# EAGLE board techlab (EAGLE 7.7.0)
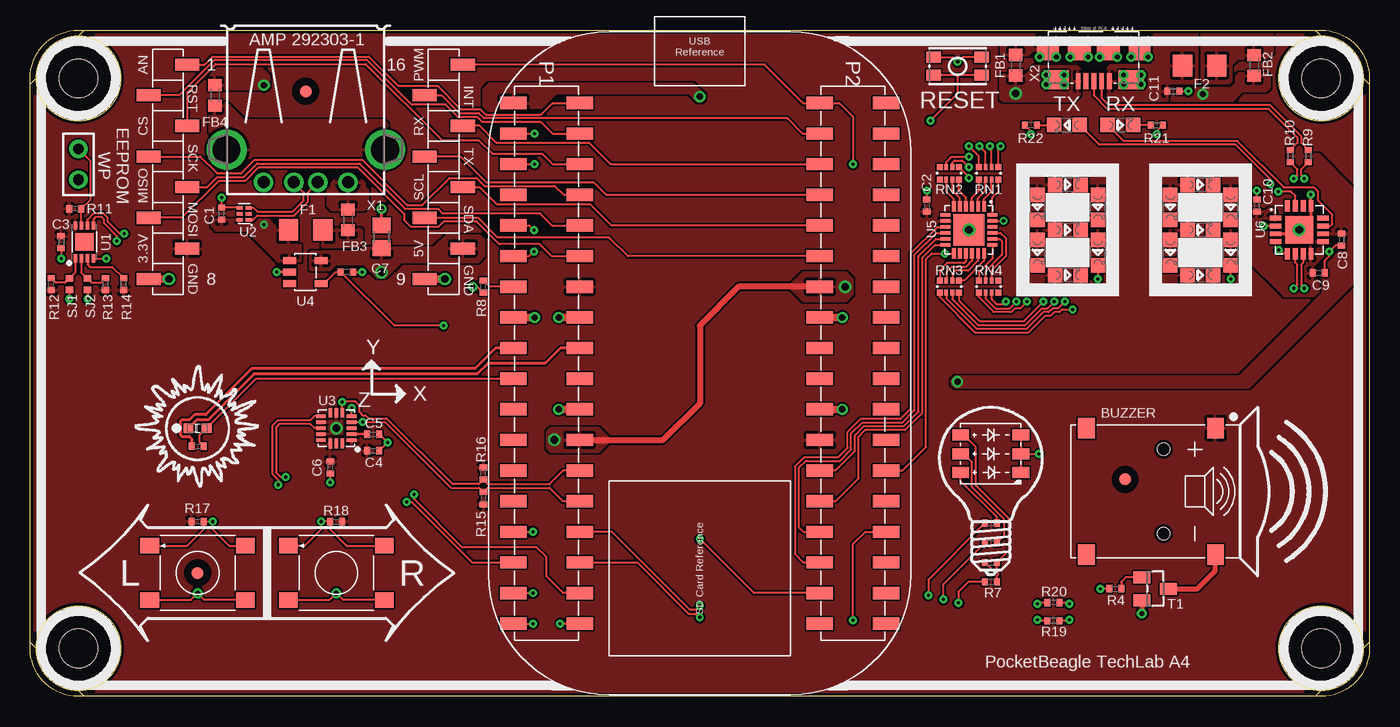
[diagram p0: board, top side]
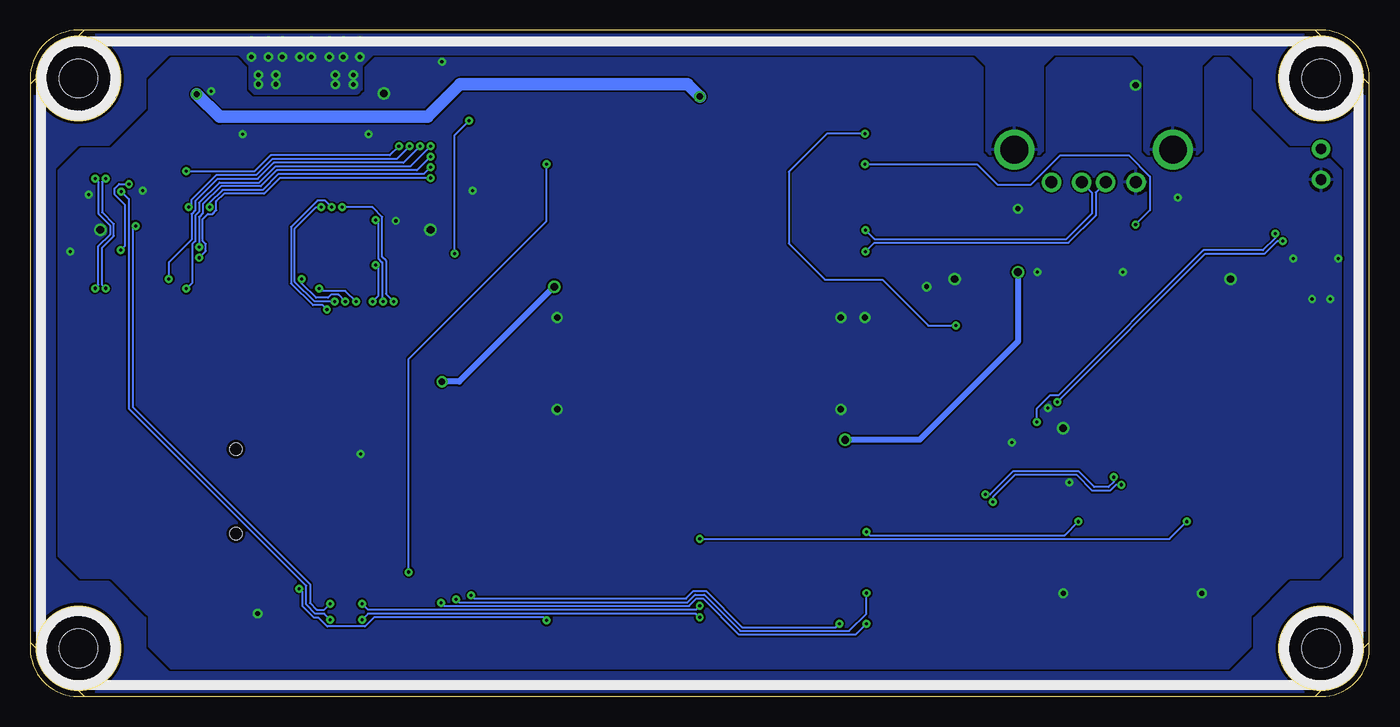
[diagram p1: board, bottom side, seen from below]

Size 111 x 55.25 mm. Coordinates in mm from the lower left corner, seen from the top.
Outline: 4,54.75 4.5,55.25 106.5,55.25 107,54.75
Outline: 110.5,51.25 111,50.75 111,4.5 110.5,4
Outline: 107,0.5 106.5,0 4.5,0 4,0.5
Outline: 0.5,4 0,4.5 0,50.75 0.5,51.25
Outline: circle at 4,51.25 radius 3.5
Outline: circle at 107,51.25 radius 3.5
Outline: circle at 4,4 radius 3.5
Outline: circle at 107,4 radius 3.5
Copper layers (1+16): Top 0.035mm / dielectric 1.5mm / Bottom 0.035mm
Design rules "default *": minimum track width 6mil, minimum drill 10mil, track to track 6mil, track to pad 6mil, pad to pad 6mil, via to via 6mil, smd to smd 0mil, copper to edge 10mil, drill to drill 10mil, minimum pad ring 12mil, minimum via ring 8mil, stop-mask expansion 2mil, vias tented up to drill 50mil, thermal gap 10mil
Holes 3.2 mm at 4,51.25 107,51.25 4,4 107,4
Milling: 8 lines

## Footprints (pad centres in the part's own frame; a part is rotated, then mirrored left to right if it is on the bottom)
SMD-140035H = smd 1.7 x 1.4: + -5.25,5; - 5.25,5; NC1 -5.25,-5.7; NC2 5.25,-5.7 | hole 1: -3.5,0.7; 3.5,0.7
0402 = smd 0.5 x 0.6: 1 -0.5,0; 2 0.5,0
0805 = smd 1.3 x 1.5: 1 -0.95,0; 2 0.95,0
PARALLEL-8PIN-0.9INCH_PITCH-SMT_GP = smd 2 x 1: 1 -9.84,8.89; 2 -13.02,6.35; 3 -9.84,3.81; 4 -13.02,1.27; 5 -9.84,-1.27; 6 -13.02,-3.81; 7 -9.84,-6.35; 8 -13.02,-8.89; 9 9.84,-8.89; 10 13.02,-6.35; 11 9.84,-3.81; 12 13.02,-1.27; 13 9.84,1.27; 14 13.02,3.81; 15 9.84,6.35; 16 13.02,8.89
1206 = smd 1.6 x 1.803: 1 -1.422,0; 2 1.422,0
0603 = smd 1 x 1.1: 1 -0.85,0; 2 0.85,0
FIDUCIAL_40MIL = smd 1.016 x 1.016: P$1 0,0
JUMPER-(X2) = drill 0.889 pad 1.524: 1 -1.27,0; 2 1.27,0
6MM_TACTILE-SWITCH = smd 1.55 x 1.3: 1 -3.975,2.25; 2 3.975,2.25; 3 -3.975,-2.25; 4 3.975,-2.25
LED_RGB_5050 = smd 1.4 x 0.9: 1(+) -2.5,-1.55; 2(+) -2.5,0; 3(+) -2.5,1.55; 4(-) 2.5,1.55; 5(-) 2.5,0; 6(-) 2.5,-1.55
0805-LED = smd 1.2 x 1.2: A 0,1.05; K 0,-1.05
POCKETBEAGLE-(ORIGIN-CENTER)-SMT.PADS(ONLY)-NO.RESTRICT = smd 1.02 x 2.2: P1.1 -21.59,-15.45; P1.2 -21.59,-9.95; P1.3 -19.05,-15.45; P1.4 -19.05,-9.95; P1.5 -16.51,-15.45; P1.6 -16.51,-9.95; P1.7 -13.97,-15.45; P1.8 -13.97,-9.95; P1.9 -11.43,-15.45; P1.10 -11.43,-9.95; P1.11 -8.89,-15.45; P1.12 -8.89,-9.95; P1.13 -6.35,-15.45; P1.14 -6.35,-9.95; P1.15 -3.81,-15.45; P1.16 -3.81,-9.95; P1.17 -1.27,-15.45; P1.18 -1.27,-9.95; P1.19 1.27,-15.45; P1.20 1.27,-9.95; P1.21 3.81,-15.45; P1.22 3.81,-9.95; P1.23 6.35,-15.45; P1.24 6.35,-9.95; P1.25 8.89,-15.45; P1.26 8.89,-9.95; P1.27 11.43,-15.45; P1.28 11.43,-9.95; P1.29 13.97,-15.45; P1.30 13.97,-9.95; P1.31 16.51,-15.45; P1.32 16.51,-9.95; P1.33 19.05,-15.45; P1.34 19.05,-9.95; P1.35 21.59,-15.45; P1.36 21.59,-9.95; P2.1 -21.59,9.95; P2.2 -21.59,15.45; P2.3 -19.05,9.95; P2.4 -19.05,15.45; P2.5 -16.51,9.95; P2.6 -16.51,15.45; P2.7 -13.97,9.95; P2.8 -13.97,15.45; P2.9 -11.43,9.95; P2.10 -11.43,15.45; P2.11 -8.89,9.95; P2.12 -8.89,15.45; P2.13 -6.35,9.95; P2.14 -6.35,15.45; P2.15 -3.81,9.95; P2.16 -3.81,15.45; P2.17 -1.27,9.95; P2.18 -1.27,15.45; P2.19 1.27,9.95; P2.20 1.27,15.45; P2.21 3.81,9.95; P2.22 3.81,15.45; P2.23 6.35,9.95; P2.24 6.35,15.45; P2.25 8.89,9.95; P2.26 8.89,15.45; P2.27 11.43,9.95; P2.28 11.43,15.45; P2.29 13.97,9.95; P2.30 13.97,15.45; P2.31 16.51,9.95; P2.32 16.51,15.45; P2.33 19.05,9.95; P2.34 19.05,15.45; P2.35 21.59,9.95; P2.36 21.59,15.45
3X3.5MM-TACTILE-SWITCH = smd 1.2 x 0.9: 1 -2,0.75; 2 2,0.75; 3 -2,-0.75; 4 2,-0.75
RN0804 = smd 0.498 x 0.5: 1 -0.801,-0.5; 4 0.801,-0.5; 5 0.801,0.5; 8 -0.801,0.5 | smd 0.3 x 0.5: 2 -0.25,-0.5; 3 0.25,-0.5; 6 0.25,0.5; 7 -0.25,0.5
SOLDER.JOINT(0402) = smd 0.55 x 0.6: 1 -0.475,0; 2 0.475,0
SOT23 = smd 1 x 1.4: 1 -0.95,-1.1; 2 0.95,-1.1; 3 0,1.1
EAALSTIC1708A0 = smd 0.8 x 0.8: 1 -0.75,0; 2 0.75,0
UDFN8,2X3(ON-SEMI) = smd 0.3 x 0.68: 1 0.75,1.36; 2 0.25,1.36; 3 -0.25,1.36; 4 -0.75,1.36; 5 -0.75,-1.36; 6 -0.25,-1.36; 7 0.25,-1.36; 8 0.75,-1.36 | smd 1.56 x 1.45: P$1 0,0
SON-6(TI)-DRY = smd 0.3 x 0.52: 1 -0.5,-0.38 | smd 0.3 x 0.49: 2 0,-0.375; 3 0.5,-0.375; 4 0.5,0.375; 5 0,0.375; 6 -0.5,0.375
QFN-16-(MMA8453Q) = smd 0.813 x 0.295: 1 1.275,-1; 2 1.275,-0.5; 3 1.275,0; 4 1.275,0.5; 5 1.275,1; 9 -1.275,1; 10 -1.275,0.5; 11 -1.275,0; 12 -1.275,-0.5; 13 -1.275,-1 | smd 0.295 x 0.813: 6 0.5,1.275; 7 0,1.275; 8 -0.5,1.275; 14 -0.5,-1.275; 15 0,-1.275; 16 0.5,-1.275
SOT23-5(TI-DBV) = smd 0.6 x 1.1: 1 0.95,1.3; 2 0,1.3; 3 -0.95,1.3; 4 -0.95,-1.3; 5 0.95,-1.3
QFN24-MJ-0.5-4X4MM = smd 0.85 x 0.3: 1 1.95,-1.25; 2 1.95,-0.75; 3 1.95,-0.25; 4 1.95,0.25; 5 1.95,0.75; 6 1.95,1.25; 13 -1.95,1.25; 14 -1.95,0.75; 15 -1.95,0.25; 16 -1.95,-0.25; 17 -1.95,-0.75; 18 -1.95,-1.25 | smd 0.3 x 0.85: 7 1.25,1.95; 8 0.75,1.95; 9 0.25,1.95; 10 -0.25,1.95; 11 -0.75,1.95; 12 -1.25,1.95; 19 -1.25,-1.95; 20 -0.75,-1.95; 21 -0.25,-1.95; 22 0.25,-1.95; 23 0.75,-1.95; 24 1.25,-1.95 | smd 2.6 x 2.6: 25 0,0
QFN16-0.65-4X4MM = smd 0.95 x 0.4: 1 -1.975,0.975; 2 -1.975,0.325; 3 -1.975,-0.325; 4 -1.975,-0.975; 9 1.975,-0.975; 10 1.975,-0.325; 11 1.975,0.325; 12 1.975,0.975 | smd 0.4 x 0.95: 5 -0.975,-1.975; 6 -0.325,-1.975; 7 0.325,-1.975; 8 0.975,-1.975; 13 0.975,1.975; 14 0.325,1.975; 15 -0.325,1.975; 16 -0.975,1.975 | smd 2.3 x 2.3: 17 0,0
292303-1 = drill 1: 1 3.5,-12.99; 2 1,-12.99; 3 -1,-12.99; 4 -3.5,-12.99 | drill 2.3: C1 6.57,-10.28; C2 -6.57,-10.28
10118192-0001LF(MICRO-USB-B-AMPHENOL-FCI) = smd 1.8 x 1.9: CGND1 -3.8,0; CGND4 3.8,0 | smd 1.9 x 1.9: CGND2 -1.2,0; CGND3 1.2,0 | smd 2.1 x 1.6: CGND5 3.1,2.55; CGND6 -3.1,2.55 | smd 0.4 x 1.35: D+ 0,2.675; D- -0.65,2.675; GND 1.3,2.675; ID 0.65,2.675; VBUS -1.3,2.675

## Placement (x,y rotation side)
BUZZER  [SMD-140035H]  93.25,17 270 top
C1  .1uF  [0402]  15.88,40.03 90 top
C2  .1uF  [0402]  74.31,40.69 270 top
C3  .1uF  [0402]  2.56,37.69 270 top
C4  .1uF  [0402]  28.44,20.38 0 top
C5  .1uF  [0402]  28.44,21.75 0 top
C6  4.7uF  [0402]  24.88,19 270 top
C7  10uF, 6.3V  [0805]  29.12,38.12 90 top
C8  .1uF  [0402]  108.69,37.88 270 top
C9  .1uF  [0402]  106.81,35.12 0 top
C10  .1uF  [0402]  101.69,40.69 90 top
C11  10nF  [0402]  94.75,50.19 0 top
EXP1  [PARALLEL-8PIN-0.9INCH_PITCH-SMT_GP]  22.84,43.5 0 top
F1  1206L025YR  [1206]  22.84,38.69 180 top
F2  1206L025YR  [1206]  96.94,52.31 0 top
FB1  120 Ohm (BLM18AG121SN1D)  [0603]  81.69,52.34 270 top
FB2  120 Ohm (BLM18AG121SN1D)  [0603]  101.44,52.31 270 top
FB3  120 Ohm (BLM18AG121SN1D)  [0603]  26.34,39.53 270 top
FB4  120 Ohm (BLM18AG121SN1D)  [0603]  15.31,49.85 270 top
FUD1  FIDUCIAL  [FIDUCIAL_40MIL]  13.88,10.25 90 top
FUD2  FIDUCIAL  [FIDUCIAL_40MIL]  22.84,50.19 0 top
FUD3  FIDUCIAL  [FIDUCIAL_40MIL]  90.75,18 0 top
JMP1  JUMPER-(X2)  [JUMPER-(X2)]  4,44.12 270 top
L.BTN  [6MM_TACTILE-SWITCH]  13.88,10.25 0 top
LD1  [LED_RGB_5050]  79.62,20.12 0 top
LD2  GREEN  [0805-LED]  83.5,40.56 0 top
LD3  GREEN  [0805-LED]  83.5,36.81 0 top
LD4  GREEN  [0805-LED]  86,42.44 90 top
LD5  GREEN  [0805-LED]  86,38.69 90 top
LD6  GREEN  [0805-LED]  86,34.94 90 top
LD7  GREEN  [0805-LED]  88.5,40.56 0 top
LD8  GREEN  [0805-LED]  88.5,36.81 0 top
LD9  GREEN  [0805-LED]  94.5,40.56 0 top
LD10  GREEN  [0805-LED]  94.5,36.81 0 top
LD11  GREEN  [0805-LED]  97,42.44 90 top
LD12  GREEN  [0805-LED]  97,38.69 90 top
LD13  GREEN  [0805-LED]  97,34.94 90 top
LD14  GREEN  [0805-LED]  99.5,40.56 0 top
LD15  GREEN  [0805-LED]  99.5,36.81 0 top
POCKETBEAGLE-1  POCKETBEAGLE-(ORIGIN-CENTER)-SMT.PADS(ONLY)-NO.RESTRICT  [POCKETBEAGLE-(ORIGIN-CENTER)-SMT.PADS(ONLY)-NO.RESTRICT]  55.5,27.62 270 top
R1  1.5k  [0402]  79.62,11.12 0 top
R2  1.5k  [0402]  79.62,12.75 0 top
R3  1k  [0402]  79.62,14.38 0 top
R4  1k  [0402]  89.94,8.94 0 top
R5  4.7k  [0402]  26.25,35.19 180 top
R6  100k  [0402]  13.88,20.75 0 top
R7  DNP(1.5k)  [0402]  79.62,9.5 0 top
R8  0  [0402]  37.56,33.98 90 top
R9  33  [0402]  105.94,44.81 270 top
R10  33  [0402]  104.44,44.81 270 top
R11  1k  [0402]  3.75,40.44 180 top
R12  1k  [0402]  1.75,34.19 90 top
R13  1k  [0402]  6.25,34.19 90 top
R14  1k  [0402]  7.75,34.19 90 top
R15  DNP(2.2k)  [0402]  37.56,16.45 270 top
R16  DNP(2.2k)  [0402]  37.56,18.48 90 top
R17  4.7k  [0402]  13.88,14.5 180 top
R18  4.7k  [0402]  25.38,14.5 0 top
R19  33  [0402]  84.81,6.28 180 top
R20  33  [0402]  84.81,7.78 180 top
R21  1k  [0402]  93.38,47.38 0 top
R22  1k  [0402]  82.94,47.38 180 top
R.BTN  [6MM_TACTILE-SWITCH]  25.38,10.25 0 top
RESET.BTN  [3X3.5MM-TACTILE-SWITCH]  76.88,52.25 180 top
RN1  1k  [RN0804]  79.44,43.38 180 top
RN2  1k  [RN0804]  76.19,43.38 180 top
RN3  1k  [RN0804]  76.19,34 0 top
RN4  1k  [RN0804]  79.44,34 0 top
RX  RED  [0805-LED]  90.38,47.38 90 top
SJ1  [SOLDER.JOINT(0402)]  3.25,34.19 90 top
SJ2  [SOLDER.JOINT(0402)]  4.75,34.19 90 top
T1  3904  [SOT23]  93.25,8.94 270 top
T2  EAALSTIC1708A0  [EAALSTIC1708A0]  13.88,22.25 0 top
TX  GREEN  [0805-LED]  85.94,47.38 270 top
U1  CAT24C32  [UDFN8,2X3(ON-SEMI)]  4.5,37.69 180 top
U2  TPD4S012DRY  [SON-6(TI)-DRY]  17.75,40.03 90 top
U3  MMA8453Q  [QFN-16-(MMA8453Q)]  25.38,22.25 0 top
U4  TPS2051CDBV  [SOT23-5(TI-DBV)]  22.81,35.19 90 top
U5  MCP23S18-E/MJ  [QFN24-MJ-0.5-4X4MM]  77.81,38.69 90 top
U6  FT230XQ-R  [QFN16-0.65-4X4MM]  105.19,38.69 0 top
X1  [292303-1]  22.84,55.62 0 top
X2  [10118192-0001LF(MICRO-USB-B-AMPHENOL-FCI)]  88.16,53.69 180 top

## Library data of the parts
BUZZER L.BTN R.BTN RESET.BTN = GHI-IOComponents
C1-C11 F1 F2 FB1-FB4 LD2-LD15 R1-R22 RN1-RN4 RX TX = GHI-BasicComponents
EXP1 JMP1 = GHI-Headers
FUD1-FUD3 = GHI
LD1 = GHI2
POCKETBEAGLE-1 = GHI-Solutions
SJ1 SJ2 = GHI-Miscellaneous
T1 T2 = GHI-Transistors
U1-U6 = GHI-IC
X1 X2 = GHI-Connectors

## Nets
3.3V: BUZZER.+ C2.2 C3.1 C4.1 C6.1 EXP1.7 LD2.A LD3.A LD4.A LD5.A LD6.A LD7.A LD8.A LD9.A LD10.A LD11.A LD12.A LD13.A LD14.A LD15.A POCKETBEAGLE-1.P1.14 POCKETBEAGLE-1.P2.23 R11.2 R12.1 R13.1 R14.1 R15.2 R16.2 R17.2 R18.2 U1.8 U3.1 U3.14 U5.8
A0: R12.2 SJ1.2 U1.1
A1: R13.2 SJ2.2 U1.2
A2: R14.2 U1.3
ADC+: POCKETBEAGLE-1.P1.18 T2.1
ADC-: POCKETBEAGLE-1.P1.17 R6.1
CGND: FB1.1 FB4.2 X1.C1 X1.C2 X2.CGND1 X2.CGND2 X2.CGND3 X2.CGND4 X2.CGND5 X2.CGND6
F2-FB2: F2.2 FB2.1
FB4-F1: F1.1 FB3.2
FTDI.3V3: C9.1 C10.1 U6.1 U6.8 U6.9
GND: C1.2 C2.1 C3.2 C4.2 C5.2 C6.2 C7.2 C8.2 C9.2 C10.2 C11.2 EXP1.8 EXP1.9 FB1.2 FB4.1 JMP1.2 L.BTN.3 L.BTN.4 LD1.4(-) LD1.5(-) LD1.6(-) POCKETBEAGLE-1.P1.15 POCKETBEAGLE-1.P1.16 POCKETBEAGLE-1.P1.22 POCKETBEAGLE-1.P2.15 POCKETBEAGLE-1.P2.21 R5.1 R8.1 R21.2 R22.2 R.BTN.3 R.BTN.4 RESET.BTN.3 RESET.BTN.4 SJ1.1 SJ2.1 T1.2 U1.4 U2.4 U3.5 U3.7 U3.10 U3.12 U4.2 U5.23 U5.25 U6.3 U6.13 U6.17 X1.4 X2.GND
GPA0: RN3.8 U5.15
GPA1: RN3.7 U5.16
GPA2: RN3.6 U5.17
GPA3: RN3.5 U5.18
GPA4: RN4.8 U5.19
GPA5: RN4.7 U5.20
GPA6: RN4.6 U5.21
GPB0: RN1.8 U5.24
GPB1: RN1.7 U5.1
GPB2: RN1.6 U5.2
GPB3: RN1.5 U5.3
GPB4: RN2.8 U5.4
GPB5: RN2.7 U5.5
GPB6: RN2.6 U5.6
LDA1: LD4.K RN3.1
LDA2: LD11.K RN1.1
LDB1: LD7.K RN3.2
LDB2: LD14.K RN1.2
LDC1: LD8.K RN3.3
LDC2: LD15.K RN1.3
LDD1: LD6.K RN3.4
LDD2: LD13.K RN1.4
LDE1: LD3.K RN4.1
LDE2: LD10.K RN2.1
LDF1: LD2.K RN4.2
LDF2: LD9.K RN2.2
LDG1: LD5.K RN4.3
LDG2: LD12.K RN2.3
LED.BLUE: LD1.1(+) R3.2
LED.GREEN: LD1.3(+) R1.2 R7.2
LED.RED: LD1.2(+) R2.2
N$5: BUZZER.- T1.3
N$10: C5.1 U3.2
N$51: R4.2 T1.1
P1.2/AIN6/GPIO87(EXP1.1): EXP1.1 POCKETBEAGLE-1.P1.2
P1.4/GPIO89(EXP1.2): EXP1.2 POCKETBEAGLE-1.P1.4
P1.6/SPI0.CS(EXP1.3): EXP1.3 POCKETBEAGLE-1.P1.6
P1.8/SPI0.CLK(EXP1.4): EXP1.4 POCKETBEAGLE-1.P1.8
P1.10/SPI0.MISO(EXP1.5): EXP1.5 POCKETBEAGLE-1.P1.10
P1.12/SPI0.MOSI(EXP1.6): EXP1.6 POCKETBEAGLE-1.P1.12
P1.19/AIN0(1.8V)(LIGHT.SENSOR): POCKETBEAGLE-1.P1.19 R6.2 T2.2
P1.26(I2C2.SDA): POCKETBEAGLE-1.P1.26 R16.1 U1.5 U3.6
P1.28(I2C2.SCL): POCKETBEAGLE-1.P1.28 R15.1 U1.6 U3.4
P1.29/PRU0.7(R.BTN): POCKETBEAGLE-1.P1.29 R18.1 R.BTN.1 R.BTN.2
P1.30/UART0.TX(USB->SERIAL): POCKETBEAGLE-1.P1.30 R20.2
P1.32/UART0.RX(USB->SERIAL): POCKETBEAGLE-1.P1.32 R19.2
P1.33/PRU0.1(RGB.R): POCKETBEAGLE-1.P1.33 R2.1
P1.33/PRU0.4(ACC.INT2): POCKETBEAGLE-1.P1.31 U3.9
P1.34/GPIO26(ACC.INT1): POCKETBEAGLE-1.P1.34 U3.11
P1.35/PRU1.10(RGB.G.ALT): POCKETBEAGLE-1.P1.35 R7.1
P1.36/PWM0A(RGB.B): POCKETBEAGLE-1.P1.36 R3.1
P2.1/PWM1A(RGB.G/EXP1.16): EXP1.16 POCKETBEAGLE-1.P2.1 R1.1
P2.3/GPIO23(EXP1.15): EXP1.15 POCKETBEAGLE-1.P2.3
P2.5/UART4.RX(EXP1.14): EXP1.14 POCKETBEAGLE-1.P2.5
P2.9/I2C1.SCL(EXP1.12): EXP1.12 POCKETBEAGLE-1.P2.9
P2.11/I2C1.SDA(EXP1.11): EXP1.11 POCKETBEAGLE-1.P2.11
P2.25/SPI1.MOSI(7SEG): POCKETBEAGLE-1.P2.25 U5.11
P2.27/SPI1.MISO(7SEG): POCKETBEAGLE-1.P2.27 U5.12
P2.29/SPI1.CLK(7SEG): POCKETBEAGLE-1.P2.29 U5.10
P2.30/PRU0.3(BUZZER): POCKETBEAGLE-1.P2.30 R4.1
P2.31/SPI1.CS(7SEG): POCKETBEAGLE-1.P2.31 U5.9
P2.33/GPIO45(L.BTN): L.BTN.1 L.BTN.2 POCKETBEAGLE-1.P2.33 R17.1
RESET#: POCKETBEAGLE-1.P2.26 RESET.BTN.1 RESET.BTN.2 U5.13
RX->R21: R21.1 RX.K
TX->R22: R22.1 TX.K
U6.2/RX(USB->SERIAL): R20.1 U6.2
U6.5->TX: TX.A U6.5
U6.11->RX: RX.A U6.11
U6.15/TX(USB->SERIAL): R19.1 U6.15
UART4.TX(EXP1.13): EXP1.13 POCKETBEAGLE-1.P2.7
UD+: R10.2 U6.6
UD-: R9.2 U6.7
USB1.D+: POCKETBEAGLE-1.P1.11 U2.3 X1.3
USB1.D-: POCKETBEAGLE-1.P1.9 U2.1 X1.2
USB1.DRVVBUS: POCKETBEAGLE-1.P1.3 R5.2 U4.4
USB1.ID: POCKETBEAGLE-1.P1.13 R8.2
USB1.VBUS: C1.1 F1.2 POCKETBEAGLE-1.P1.5 U2.6 U4.1
USB.HOST.VOUT: FB3.1 X1.1
VBUS: C11.1 F2.1 X2.VBUS
VIN: FB2.2 POCKETBEAGLE-1.P1.1
VOUT: C7.1 C8.1 EXP1.10 POCKETBEAGLE-1.P1.24 POCKETBEAGLE-1.P2.13 U4.5 U6.10
WP: JMP1.1 R11.1 U1.7
XD+: R10.1 X2.D+
XD-: R9.1 X2.D-

## Tracks (layer width: path | path; a pad name or v marks a point on that pad's centre or on a via)
3.3V
  pour Top (rank 5): -3.5,58.75 114.5,58.75 114.5,-3.5 -3.5,-3.5
A0
  Top 0.152: R12.2 2.12,34.31 2.9,34.31 SJ1.2 3.75,35.16 U1.1
A1
  Top 0.152: U1.2 4.25,35.16 SJ2.2 5.1,34.31 5.88,34.31 R13.2
A2
  Top 0.152: U1.3 4.75,35.81 4.94,35.62 6.81,35.62 R14.2
ADC+
  Top 0.254: POCKETBEAGLE-1.P1.18 43.96,28.89 42.69,27.62 37.94,27.62 37.06,26.75 18.56,26.75 14.75,22.94 13.81,22.94 T2.1
ADC-
  Top 0.254: POCKETBEAGLE-1.P1.17 38.58,28.89 36.88,27.19 18.38,27.19 14.56,23.38 13.62,23.38 13.19,22.94 12.56,22.94 12.44,22.81 12.44,21.69 12.56,21.56 13.19,21.56 13.38,21.38 R6.1
CGND  (via drill 0.38)
  Top 0.152: X2.CGND4 84.32,53.69 v83.66,53.03 | X2.CGND3 87.01,53.69 v87.67,53.03 | X2.CGND2 89.3,53.69 v88.64,53.03 | X2.CGND1 91.99,53.69 v92.65,53.03 | X2.CGND5 85.45,50.74 v85.69,50.74 | X2.CGND6 90.89,50.77 v90.62,50.77
  Bottom 0.406: 0.94,27.75 0.94,27.56
  other vias: 83.66,54.35 85.06,54.35 86.2,54.35 86.2,53.03 87.67,54.35 90.11,54.35 90.11,53.03 91.26,54.35 92.65,54.35 91.26,53.03 92.09,51.53 90.62,51.53 92.09,50.77 84.22,51.53 85.69,51.53 84.22,50.74 88.64,54.32 85.06,53.03
  pour Top: 14.88,49.38 14.88,44.44 15.62,43.69 17.38,43.69 18.5,44.81 27.62,44.81 28.75,43.69 30.06,43.69 30.81,44.44 30.81,46.25 29.31,47.75 17.75,47.75 16.12,49.38
  pour Bottom: -0.12,27.62 -0.12,-0.12 111.12,-0.12 111.12,27.62 109,27.62 109,11.5 107,9.5 104.5,9.5 101.5,6.5 101.5,4 99.5,2 11.5,2 9.5,4 9.5,6.5 6.5,9.5 4,9.5 2,11.5 2,27.62
  pour Bottom: 111.12,27.62 111.12,55.38 -0.12,55.38 -0.12,27.62 2,27.62 2,43.75 4,45.75 6.5,45.75 9.5,48.75 9.5,51.25 11.5,53.25 13.03,53.25 13.97,52.31 13.97,45.25 14.28,44.94 18.28,44.94 18.59,45.25 18.59,52.31 19.53,53.25 26.16,53.25 27.09,52.31 27.09,45.25 27.41,44.94 31.41,44.94 31.72,45.25 31.72,52.31 32.66,53.25 82.62,53.25 83.56,52.31 83.56,50.34 83.91,50 92.41,50 92.75,50.34 92.75,52.31 93.69,53.25 99.5,53.25 101.5,51.25 101.5,48.75 104.5,45.75 107,45.75 109,43.75 109,27.62
  pour Top: 80.66,53.16 82.75,53.16 83.19,53.59 84.34,53.59 84.34,53.78 83.19,53.78 82.72,54.25 80.75,54.25 80.44,53.94 80.44,53.38
F2-FB2
  pour Top (rank 2): 97.12,55.25 97.12,51.06 97.31,50.88 99.38,50.88 99.56,51.06 99.56,52.38 99.94,52.75 100.12,52.94 102.5,52.94 103,53.44 103,55.25
FB4-F1
  pour Top (rank 2): 24.12,38.81 27.31,38.81 27.5,38.62 27.5,37.5 27.25,37.25 24.19,37.25
FTDI.3V3
  pour Top: 103.25,37.5 103.25,40.19 103,40.44 102.62,40.44 102.44,40.25 101,40.25 100.81,40.06 100.81,36.31 103.94,33.19 106.44,33.19 106.81,33.56 106.81,34.44 106.44,34.81 106.44,35.75 107.19,36.5 107.19,37.62 106.44,37.81 105.75,37.12 103.94,37.12 103.56,37.5
GND  (via drill 0.25, 0.41, 0.51, 0.61, 0.64)
  Top 0.152: U2.4 C1.2 v15.88,41.38 | LD1.4(-) LD1.5(-) | LD1.5(-) LD1.6(-) | LD1.5(-) v83.62,20.12 | R.BTN.4 25.94,8 v25.38,8.56 24.81,8 R.BTN.3 | L.BTN.3 13.31,8 v13.88,8.56 14.44,8 L.BTN.4 | C3.2 v2.56,36.31 | U1.4 v6.31,36.33 | SJ1.1 v3.25,32.94 | SJ2.1 v4.75,32.94 | C2.1 v74.31,41.94 | U5.23 v80.69,39.44 | C11.2 v96,50.19 | C10.2 v101.69,41.94 | C9.2 107.31,36.12 107.69,36.5 v107.69,36.88 108.19,37.38 C8.2 | RESET.BTN.4 76.5,53 v76.88,52.62 77.25,53 RESET.BTN.3 | U3.5 v26.65,23.94 | C5.2 v29.62,21.06 C4.2 | R8.1 37.06,33.98 v36.69,33.98 | C6.2 v24.88,17.75 | R5.1 v27.5,35.19 | R22.2 82.94,46.88 v82.94,46.62 | R21.2 93.38,46.88 v93.38,46.62
  Top 0.254: v106.16,41.62 U6.13 106.16,39.66 U6.17 104.86,38.36 U6.3 | C7.2 v29.12,40.44 | U4.2 v20.44,35.19
  Top 0.406: T1.2 v92.15,6.88
  Top 0.61: EXP1.8 v11.5,34.61 | EXP1.9 v34.38,34.61 | POCKETBEAGLE-1.P2.15 v67.31,31.43 | POCKETBEAGLE-1.P2.21 v67.31,23.82 | POCKETBEAGLE-1.P1.15 v41.81,31.43 | POCKETBEAGLE-1.P1.16 v43.81,31.43 | POCKETBEAGLE-1.P1.22 v43.81,23.82
  other vias: 19.38,50.69 81.69,50 77.81,38.69 105.19,38.69 25.38,22.25
  pour Bottom (rank 2): -1.5,56.75 112.5,56.75 112.5,-1.5 -1.5,-1.5
  pour Top: 14.88,50.31 14.88,51.5 15.5,52.12 19.19,52.12 19.81,51.5 19.81,50.56 19.56,50.31
  pour Top: 87,52.06 87,49.84 86.47,49.31 80.66,49.31 80.44,49.53 80.44,51.38 80.66,51.59 82.56,51.59 83.28,52.31 86.75,52.31
  pour Top: 24.12,21.75 25.88,21.75 25.88,23.5 24.88,23.5 24.88,22.75 24.12,22.75
GPA0
  Top 0.152: U5.15 77.56,36.12 77.38,35.94 76,35.94 75.39,35.32 RN3.8
GPA1
  Top 0.152: U5.16 78.06,36.12 77.56,35.62 76.38,35.62 75.94,35.19 RN3.7
GPA2
  Top 0.152: U5.17 78.56,36.12 77.75,35.31 76.69,35.31 76.44,35.06 RN3.6
GPA3
  Top 0.152: U5.18 79.06,36.12 77.44,34.5 RN3.5
GPA4
  Top 0.152: U5.19 79.76,36.33 78.64,35.2 RN4.8
GPA5
  Top 0.152: U5.20 80.38,37.94 80.56,37.75 80.56,36.62 79.19,35.25 RN4.7
GPA6
  Top 0.152: U5.21 80.44,38.44 80.88,38 80.88,36.5 79.69,35.31 RN4.6
GPB0
  Top 0.152: U5.24 79.76,41.39 80.24,41.86 RN1.8
GPB1
  Top 0.152: U5.1 79.06,41.25 79.69,41.88 RN1.7
GPB2
  Top 0.152: U5.2 78.56,41.31 79.19,41.94 RN1.6
GPB3
  Top 0.152: U5.3 78.06,41.38 78.64,41.95 RN1.5
GPB4
  Top 0.152: U5.4 77.56,41.38 76.99,41.95 RN2.8
GPB5
  Top 0.152: U5.5 77.06,41.31 76.44,41.94 RN2.7
GPB6
  Top 0.152: U5.6 76.56,41.25 75.94,41.88 RN2.6
LDA1  (via drill 0.25)
  Top 0.152: RN3.1 75.39,33.11 78.31,30.19 82.75,30.19 84.12,31.56 84.56,31.56 84.88,31.88 85.31,31.88 85.53,32.09 v86.41,32.09 | LD4.K 86,41.39 v86,40.56
  Bottom 0.152: v86,40.56 86.56,41.12 87.19,41.12 89.38,38.94 89.38,34.25 87.56,32.44 86.75,32.44 v86.41,32.09
LDA2  (via drill 0.25)
  Top 0.152: LD11.K v98.05,43.56 | RN1.1 80.24,45.43 v80.44,45.62
  Bottom 0.152: v98.05,43.56 92.38,43.56 91.06,44.88 81.19,44.88 v80.44,45.62
LDB1  (via drill 0.25)
  Top 0.152: RN3.2 75.94,33 78.44,30.5 82.62,30.5 84,31.88 84.44,31.88 84.75,32.19 85.19,32.19 v85.75,32.75 | v86.88,40.56 87.75,39.69 88.33,39.69 LD7.K
  Bottom 0.152: v85.75,32.75 87.44,32.75 89.06,34.38 89.06,38.81 87.31,40.56 v86.88,40.56
LDB2  (via drill 0.25)
  Top 0.152: LD14.K 98.7,40.31 98.12,40.31 v97.88,40.56 | RN1.2 79.69,45.5 v79.56,45.62
  Bottom 0.152: v97.88,40.56 97.62,40.81 97.62,41.19 95.56,43.25 92.25,43.25 90.94,44.56 80.62,44.56 v79.56,45.62
LDC1  (via drill 0.25)
  Top 0.152: RN3.3 76.44,32.94 78.56,30.81 82.5,30.81 83.88,32.19 84.31,32.19 v84.88,32.75 | LD8.K v88.5,34.62
  Bottom 0.152: v84.88,32.75 85.44,33.31 86.06,33.31 86.31,33.06 87.31,33.06 88.5,34.25 v88.5,34.62
LDC2  (via drill 0.25)
  Top 0.152: v99.5,34.62 LD15.K | RN1.3 79.19,45.12 v78.69,45.62
  Bottom 0.152: v99.5,34.62 99.5,36 97.62,37.88 97.62,40 97.31,40.31 97.31,41.06 95.44,42.94 92.12,42.94 90.81,44.25 80.06,44.25 v78.69,45.62
LDD1  (via drill 0.25)
  Top 0.152: RN3.4 76.99,32.82 78.69,31.12 82.38,31.12 v84,32.75 | LD6.K v87.05,33.81
  Bottom 0.152: v84,32.75 84.88,33.62 86.86,33.62 v87.05,33.81
LDD2  (via drill 0.25)
  Top 0.152: LD13.K v98.05,33.81 | RN1.4 78.64,44.8 v77.81,45.62
  Bottom 0.152: v98.05,33.81 97.56,34.3 97.56,37.5 97.31,37.75 97.31,39.88 97,40.19 97,40.94 95.31,42.62 92,42.62 90.69,43.94 79.5,43.94 v77.81,45.62
LDE1  (via drill 0.25)
  Top 0.152: RN4.1 78.64,33.11 79.88,31.88 81.31,31.88 81.62,32.19 82.06,32.19 v82.62,32.75 | LD3.K v82.38,35.76
  Bottom 0.152: v82.62,32.75 82.12,33.25 82.12,35.51 v82.38,35.76
LDE2  (via drill 0.25)
  Top 0.152: LD10.K 95.55,36.81 96.56,36.81 v97,36.38 | RN2.1 77.81,43.05 v77.81,43
  Bottom 0.152: v97,36.38 96.44,36.94 96.44,37.53 96.69,37.78 96.69,39.59 96.28,40 95.88,40 95.56,40.31 95.56,41.06 94.94,41.69 91.62,41.69 90.31,43 v77.81,43
LDF1  (via drill 0.25)
  Top 0.152: RN4.2 79.19,33 80,32.19 81.19,32.19 v81.75,32.75 | LD2.K v82.38,39.51
  Bottom 0.152: v81.75,32.75 81.81,32.81 81.81,36 82.12,36.31 82.12,39.26 v82.38,39.51
LDF2  (via drill 0.25)
  Top 0.152: RN2.2 76.44,44.25 76.62,44.44 77.25,44.44 v77.81,43.88 | v96.12,40.56 95.88,40.31 95.3,40.31 LD9.K
  Bottom 0.152: v96.12,40.56 96.12,40.94 95.06,42 91.75,42 90.44,43.31 78.38,43.31 v77.81,43.88
LDG1  (via drill 0.25)
  Top 0.152: RN4.3 79.69,32.94 80.12,32.5 80.62,32.5 v80.88,32.75 | LD5.K 87.05,39.76 86.81,40 85.69,40 v85.12,40.56
  Bottom 0.152: v85.12,40.56 82.62,40.56 81.81,39.75 81.81,36.44 81.5,36.12 81.5,33.38 v80.88,32.75
LDG2  (via drill 0.25)
  Top 0.152: RN2.3 75.94,44.31 76.38,44.75 v77.81,44.75 | LD12.K 97,37.64 v97,37.25
  Bottom 0.152: v97,37.25 97,39.75 96.69,40.06 96.69,40.81 95.19,42.31 91.88,42.31 90.56,43.62 78.94,43.62 v77.81,44.75
LED.BLUE
  Top 0.152: R3.2 80.12,14.88 77.12,17.88 LD1.1(+)
LED.GREEN
  Top 0.152: LD1.3(+) 77.39,21.68 78.38,20.69 78.38,17.5 81.12,14.75 81.12,12.12 R1.2 80.12,10.62 80.25,10.5 80.25,10.12 80.12,10 R7.2
LED.RED
  Top 0.152: R2.2 80.75,13.38 80.75,14.69 78.06,17.38 78.06,19.44 77.38,20.12 LD1.2(+)
N$5
  Top 0.406: T1.3 96.75,8.94 98.25,10.44 BUZZER.-
N$10
  Top 0.203: U3.2 C5.1
N$51
  Top 0.152: T1.1 90.83,9.89 90.44,9.5 R4.2
P1.2/AIN6/GPIO87(EXP1.1)
  Top 0.152: POCKETBEAGLE-1.P1.2 43.3,49.22 42.34,48.25 37.75,48.25 37.31,48.69 35.69,48.69 33.75,50.62 30.5,50.62 28.06,53.06 15.12,53.06 14.45,52.39 EXP1.1
P1.4/GPIO89(EXP1.2)
  Top 0.152: EXP1.2 12.35,49.85 15.25,52.75 27.94,52.75 31.62,49.06 34.44,49.06 35.44,48.06 37.06,48.06 37.48,47.64 42.34,47.64 43.3,46.67 POCKETBEAGLE-1.P1.4
P1.6/SPI0.CS(EXP1.3)
  Top 0.152: POCKETBEAGLE-1.P1.6 43.3,44.13 42.44,45 38.31,45 37.19,46.12 34.12,46.12 27.81,52.44 15.38,52.44 13,50.07 EXP1.3
P1.8/SPI0.CLK(EXP1.4)
  Top 0.152: EXP1.4 14.11,44.77 15.5,43.38 17.5,43.38 18.62,44.5 27.5,44.5 31.25,40.75 32.5,40.75 34.75,43 37,43 37.66,42.34 43.48,42.34 44.22,41.59 POCKETBEAGLE-1.P1.8
P1.10/SPI0.MISO(EXP1.5)
  Top 0.152: POCKETBEAGLE-1.P1.10 43.26,39.05 42.27,40.05 34.2,40.05 33.81,40.44 31.06,40.44 27.31,44.19 18.81,44.19 17.69,43.06 15.5,43.06 14.67,42.23 EXP1.5
P1.12/SPI0.MOSI(EXP1.6)
  Top 0.152: POCKETBEAGLE-1.P1.12 43.23,36.52 42.24,37.51 38.87,37.51 37,39.38 34.25,39.38 33.81,38.94 31.56,38.94 31,39.5 31,40 27.12,43.88 18.94,43.88 17.81,42.75 15.62,42.75 12.56,39.69 EXP1.6
P1.19/AIN0(1.8V)(LIGHT.SENSOR)
  Top 0.152: POCKETBEAGLE-1.P1.19 18.73,26.36 T2.2 14.06,21.69 14.06,21.06 R6.2
P1.26(I2C2.SDA)  (via drill 0.25)
  Top 0.152: U1.5 5.25,39.56 5.44,39.75 5.94,39.75 6.12,39.56 6.12,39.25 7.19,38.19 v7.19,37.75 | U3.6 v25.88,24.44 25.94,24.5 26.94,24.5 27.25,24.19 27.25,23.62 27.56,23.31 27.81,23.31 28.06,23.06 29.56,23.06 35,17.62 37.2,17.62 R16.1 37.92,17.62 43.06,17.62 44.17,18.73 POCKETBEAGLE-1.P1.26
  Bottom 0.152: v25.88,24.44 13.62,36.69 8.69,36.69 7.62,37.75 v7.19,37.75
P1.28(I2C2.SCL)  (via drill 0.25)
  Top 0.152: U1.6 4.75,39.56 5.25,40.06 6.06,40.06 6.44,39.69 6.44,39.38 7.44,38.38 v7.81,38.38 | U3.4 v27.56,22.75 29.44,22.75 34.88,17.31 37.2,17.31 R15.1 37.93,17.31 43.06,17.31 44.18,16.2 POCKETBEAGLE-1.P1.28
  Bottom 0.152: v27.56,22.75 27.56,23.88 26.44,25 25.75,25 13.75,37 8.81,37 7.81,38 v7.81,38.38
P1.29/PRU0.7(R.BTN)  (via drill 0.25)
  Top 0.152: R.BTN.1 22.75,12.5 24.12,13.88 v24.12,14.5 R18.1 24.88,13.88 26.25,12.5 R.BTN.2 | POCKETBEAGLE-1.P1.29 v41.69,13.65
  Bottom 0.152: v41.69,13.65 41.41,13.38 25.25,13.38 v24.12,14.5
P1.30/UART0.TX(USB->SERIAL)  (via drill 0.25)
  Top 0.152: v55.5,7.5 55.19,7.19 54.69,7.19 48.22,13.65 POCKETBEAGLE-1.P1.30 | R20.2 83.59,7.78 v83.5,7.69
  Bottom 0.152: v55.5,7.5 55.81,7.19 83,7.19 v83.5,7.69
P1.32/UART0.RX(USB->SERIAL)  (via drill 0.25)
  Top 0.152: POCKETBEAGLE-1.P1.32 50.32,11.12 54.56,6.88 55.19,6.88 v55.5,6.56 | R19.2 83.59,6.28 v83.5,6.38
  Bottom 0.152: v55.5,6.56 55.81,6.88 83,6.88 v83.5,6.38
P1.33/PRU0.1(RGB.R)  (via drill 0.25)
  Top 0.152: POCKETBEAGLE-1.P1.33 v41.69,8.57 | v75.69,8.06 75.69,9.31 R2.1
  Bottom 0.152: v75.69,8.06 75.44,7.81 56.5,7.81 55.88,8.44 55.12,8.44 52.12,5.44 43.12,5.44 41.69,6.88 v41.69,8.57
P1.33/PRU0.4(ACC.INT2)  (via drill 0.25)
  Top 0.152: v20.56,17.56 20.56,17.94 20.06,18.44 20.06,22.44 20.53,22.91 23.22,22.91 23.56,23.25 U3.9 | v31.19,16.12 31.62,16.12 36.63,11.12 POCKETBEAGLE-1.P1.31
  Bottom 0.152: v20.56,17.56 21,17.56 21.5,17.06 22.94,17.06 24.25,18.38 29.38,18.38 31.19,16.56 v31.19,16.12
P1.34/GPIO26(ACC.INT1)  (via drill 0.25)
  Top 0.152: U3.11 23.56,22.25 23.22,22.59 20.66,22.59 20.38,22.31 20.38,18.56 20.75,18.19 v21.19,18.19 | POCKETBEAGLE-1.P1.34 44.17,8.57 42.8,9.95 42.8,11.56 41.98,12.38 35.8,12.38 31.81,16.38 v31.81,16.75
  Bottom 0.152: v21.19,18.19 21.19,17.81 21.62,17.38 22.81,17.38 24.12,18.69 29.5,18.69 31.44,16.75 v31.81,16.75
P1.35/PRU1.10(RGB.G.ALT)  (via drill 0.25)
  Top 0.152: POCKETBEAGLE-1.P1.35 v41.69,6.04 | R7.1 77.75,9.5 76.94,8.69 v76.94,7.75
  Bottom 0.152: v76.94,7.75 76.69,7.5 56.38,7.5 55.75,8.12 55.25,8.12 52.25,5.12 42.6,5.12 v41.69,6.04
P1.36/PWM0A(RGB.B)  (via drill 0.25)
  Top 0.152: R3.1 74.44,9.69 v74.44,8.38 | POCKETBEAGLE-1.P1.36 v43.94,6.04
  Bottom 0.152: v74.44,8.38 74.19,8.12 56.62,8.12 56,8.75 55,8.75 52,5.75 44.22,5.75 v43.94,6.04
P2.1/PWM1A(RGB.G/EXP1.16)  (via drill 0.25)
  Top 0.152: EXP1.16 60.88,52.39 64.06,49.22 POCKETBEAGLE-1.P2.1 67.06,49.22 68.2,48.08 v68.2,44.12 | R1.1 79.62,10.62 v79.62,10.31
  Bottom 0.152: v79.62,10.31 79.62,28 68.2,39.42 v68.2,44.12
P2.3/GPIO23(EXP1.15)
  Top 0.152: POCKETBEAGLE-1.P2.3 64.03,46.67 62.76,47.95 37.62,47.95 37.19,48.38 35.56,48.38 34.09,49.85 EXP1.15
P2.5/UART4.RX(EXP1.14)
  Top 0.152: EXP1.14 37.25,47.31 38.63,45.93 46.31,45.93 48.11,44.13 POCKETBEAGLE-1.P2.5
P2.9/I2C1.SCL(EXP1.12)
  Top 0.152: EXP1.12 37.27,42.23 38.71,40.79 46.44,40.79 48.17,39.05 POCKETBEAGLE-1.P2.9
P2.11/I2C1.SDA(EXP1.11)
  Top 0.152: EXP1.11 37.12,39.69 38.75,38.06 48,38.06 49.55,36.52 POCKETBEAGLE-1.P2.11
P2.25/SPI1.MOSI(7SEG)
  Top 0.152: POCKETBEAGLE-1.P2.25 66.73,18.73 68.35,20.35 68.35,21.66 69.08,22.39 72.39,22.39 73.62,23.62 73.62,36.5 75.06,37.94 U5.11
P2.27/SPI1.MISO(7SEG)
  Top 0.152: POCKETBEAGLE-1.P2.27 66.76,16.2 68.66,18.09 68.66,21.53 69.21,22.09 72.53,22.09 73.94,23.5 73.94,36.38 75,37.44 U5.12
P2.29/SPI1.CLK(7SEG)
  Top 0.152: U5.10 75.12,38.44 73.31,36.62 73.31,23.75 72.26,22.7 68.95,22.7 68.05,21.8 68.05,20.48 67.11,19.55 64.3,19.55 63.69,18.94 63.69,14.06 64.09,13.65 POCKETBEAGLE-1.P2.29
P2.30/PRU0.3(BUZZER)  (via drill 0.25)
  Top 0.152: POCKETBEAGLE-1.P2.30 69.22,13.65 68.2,12.64 v68.2,6.31 | R4.1 v88.69,8.94
  Bottom 0.152: v68.2,6.31 68.45,6.56 82.5,6.56 83.25,5.81 86.38,5.81 87.12,6.56 87.5,6.56 88.44,7.5 88.44,8.69 v88.69,8.94
P2.31/SPI1.CS(7SEG)
  Top 0.152: U5.9 75.19,38.94 73,36.75 73,23.88 72.13,23 68.81,23 67.74,21.93 67.74,20.62 66.98,19.85 64.17,19.85 63.38,19.06 63.38,11.81 64.07,11.12 POCKETBEAGLE-1.P2.31
P2.33/GPIO45(L.BTN)  (via drill 0.25)
  Top 0.152: POCKETBEAGLE-1.P2.33 59.99,8.57 v55.5,13.06 | L.BTN.1 13,12.5 14.38,13.88 R17.1 v15.12,14.5 15.12,13.88 16.5,12.5 L.BTN.2
  Bottom 0.152: v55.5,13.06 16.56,13.06 v15.12,14.5
RESET#  (via drill 0.25)
  Top 0.152: POCKETBEAGLE-1.P2.26 72.3,18.73 74.25,20.69 74.25,36.25 74.74,36.74 v75.81,36.74 U5.13 | 77,51.5 76.88,51.38 | 76.88,51.38 76.75,51.5 | 76.75,51.5 RESET.BTN.2 | RESET.BTN.1 76.75,51.5 | 76.88,51.38 76.88,50 v74.62,47.75
  Bottom 0.152: v75.81,36.74 75.81,46.56 v74.62,47.75
RX->R21
  Top 0.152: R21.1 RX.K
TX->R22
  Top 0.152: R22.1 TX.K
U6.2/RX(USB->SERIAL)  (via drill 0.25)
  Top 0.152: U6.2 v102.25,39.01 | R20.1 86.03,7.78 v86.12,7.69
  Bottom 0.152: v102.25,39.01 102.5,38.76 102.5,24 87.81,9.31 87.81,7.75 87.25,7.19 86.62,7.19 v86.12,7.69
U6.5->TX  (via drill 0.25)
  Top 0.152: U6.5 103.79,36.71 v103.5,37 | v102.81,42.5 102.81,42.88 99.94,45.75 88.61,45.75 TX.A
  Bottom 0.152: v103.5,37 103.12,37.38 103.12,40.75 104,41.62 104,42.12 103.62,42.5 v102.81,42.5
U6.11->RX
  Top 0.152: U6.11 107.76,39.01 107.94,39.19 107.94,39.94 106.75,41.12 106.75,41.88 106.44,42.19 103.94,42.19 100.06,46.06 90.64,46.06 RX.A
U6.15/TX(USB->SERIAL)  (via drill 0.25)
  Top 0.152: U6.15 104.86,41.51 104.5,41.88 v103.44,41.88 | R19.1 86.03,6.28 v86.12,6.38
  Bottom 0.152: v103.44,41.88 102.81,41.25 102.81,23.88 88.12,9.19 88.12,7.62 87.38,6.88 86.62,6.88 v86.12,6.38
UART4.TX(EXP1.13)
  Top 0.152: EXP1.13 35.67,44.77 37.8,42.64 46.69,42.64 47.73,41.59 POCKETBEAGLE-1.P2.7
UD+  (via drill 0.25)
  Top 0.152: v104.75,42.94 105.03,43.22 105.03,43.72 R10.2 | v104.75,33.84 105.03,34.12 105.03,35.81 104.86,35.98 U6.6
  Bottom 0.152: v104.75,42.94 105.03,42.66 105.03,40.16 104.06,39.19 104.06,38.19 105.03,37.22 105.03,34.12 v104.75,33.84
UD-  (via drill 0.25)
  Top 0.152: v105.62,42.94 105.34,43.22 105.34,43.72 R9.2 | U6.7 105.51,35.98 105.34,35.81 105.34,34.12 v105.62,33.84
  Bottom 0.152: v105.62,42.94 105.34,42.66 105.34,40.03 104.38,39.06 104.38,38.31 105.34,37.34 105.34,34.12 v105.62,33.84
USB1.D+  (via drill 0.25)
  Top 0.152: POCKETBEAGLE-1.P1.11 41.37,36.52 v41.75,36.9 | X1.3 22.68,41.8 22.68,41.12 21.75,40.19 18.84,40.19 18.5,40.53 U2.3
  Bottom 0.152: X1.3 22.68,41.8 22.68,39.89 24.94,37.63 41.01,37.63 v41.75,36.9
USB1.D-  (via drill 0.25)
  Top 0.152: POCKETBEAGLE-1.P1.9 41.37,39.05 v41.75,38.67 | X1.2 23,41.8 23,41.01 21.88,39.88 18.84,39.88 18.5,39.53 U2.1
  Bottom 0.152: X1.2 23,41.8 23,40.03 25.1,37.94 41.01,37.94 v41.75,38.67
USB1.DRVVBUS  (via drill 0.25)
  Top 0.152: POCKETBEAGLE-1.P1.3 v41.81,46.67 | v34.25,30.75 30.19,30.75 R5.2 25.31,35.19 24.36,34.24 U4.4
  Bottom 0.152: v41.81,46.67 44.95,46.67 48.12,43.5 48.12,37.56 45.12,34.56 40.38,34.56 36.56,30.75 v34.25,30.75
USB1.ID
  Top 0.152: POCKETBEAGLE-1.P1.13 38.06,33.98 R8.2
USB1.VBUS  (via drill 0.25)
  Top 0.152: POCKETBEAGLE-1.P1.5 v41.81,44.13
  Bottom 0.152: v41.81,44.13 32.51,44.13 30.81,42.44 28.06,42.44 25.62,44.88 19.94,44.88 18.19,43.12 18.19,40.31 v19.38,39.12
  pour Top: 21.5,38.81 21.5,37.44 22.44,37.44 22.44,36.12 22.38,36.06 20.5,36.06 17.94,38.62 15.44,38.62 15.06,39 15.06,39.44 15.19,39.56 17.56,39.56 17.56,39.12 18.56,39.12 19,39.56 19.75,39.56 20.5,38.81
USB.HOST.VOUT
  pour Top: 25,40.31 27.69,40.31 28.06,40.69 28.06,41.94 27.75,42.25 27.75,42.56 27.5,42.81 25.19,42.81 24.94,42.56 24.94,42.25 24.62,41.94 24.62,40.69
VBUS
  pour Top: 89.31,52.12 89.31,49.56 89.5,49.38 94.19,49.38 94.31,49.5 94.31,50.69 94.5,50.88 96.56,50.88 96.75,51.06 96.75,55.25 93.19,55.25 93.19,52.62 92.88,52.31 89.5,52.31
VIN  (via drill 0.51)
  Bottom 1.016: v55.5,49.75 56.5,50.75 75.38,50.75 78.06,48.06 95.31,48.06 v97.19,49.94
  pour Top (rank 3): 100.25,51.69 102.38,51.69 102.69,51.38 102.69,50.5 102.38,50.19 100.44,50.19 99.62,49.38 94.69,49.38 94.69,50.44 99.56,50.44 100,50.88 100,51.44
  pour Top: 40.06,48.88 42.44,48.88 43.12,49.56 43.62,50.06 44.69,50.06 54.62,50.06 55.31,49.38 55.69,49.38 55.88,49.56 55.88,49.88 55.62,50.12 55,50.75 53.94,50.75 38,50.75 37.56,50.31 37.56,49 37.94,48.62 39.81,48.62
VOUT  (via drill 0.51, 0.64)
  Top 0.508: POCKETBEAGLE-1.P1.24 52.46,21.27 55.5,24.31 55.5,30.75 58.73,33.98 POCKETBEAGLE-1.P2.13
  Bottom 0.508: v29.12,35.19 29.12,29.44 37.29,21.27 v43.44,21.27 | v67.56,33.98 75.44,26.1 v76.88,26.1
  pour Top: 27.69,37.25 33.5,37.25 34.5,38.25 37.25,38.25 37.62,37.88 37.62,36.5 37.12,36 30.75,36 29.44,34.69 28.81,34.69 27.69,35.81 25.31,35.81 24.81,35.31 23.31,35.31 23.19,35.44 23.19,36.81 23.31,36.94 27.38,36.94
  pour Top: 67.66,35.1 64.03,35.1 63.03,34.1 63.03,33.85 64.03,32.85 67.66,32.85 68.16,33.35 68.16,34.6
  pour Top: 47.15,22.21 43.15,22.21 42.84,21.9 42.84,20.65 43.15,20.34 47.15,20.34 47.97,21.15 47.97,21.4
  pour Top: 104.25,44.5 104.25,45.12 105,45.88 105.38,45.88 106.25,45 106.81,45 109.69,42.12 109.69,34.25 101,25.56 76.69,25.56 76.38,25.88 76.38,26.25 76.69,26.56 100.25,26.56 107.12,33.44 107.12,34.88 107.62,35.38 107.62,36 108.5,36.88 109.12,36.88 109.25,37 109.25,38.12 109.12,38.25 107.12,38.25 107.12,38.44 107.81,38.44 107.81,40.06 106.56,40.06 106.56,42.19
WP
  Top 0.152: U1.7 R11.1 5,41.19 5,44.4 JMP1.1
XD+
  Top 0.152: X2.D+ 88.16,49.84 89.25,48.75 102.62,48.75 105.03,46.34 105.03,45.91 R10.1
XD-
  Top 0.152: X2.D- 88.81,49.63 89.38,49.06 102.75,49.06 105.34,46.47 105.34,45.91 R9.1

## Text on the board
tPlace: RESET | EEPROM / WP | Y | Z | X | L | R | PocketBeagle TechLab A4
Document: USB / Reference | SD Card Reference